# Altium PCB BLDC_4.PcbDoc (part 1 of 2)
Units mm, origin at the board's own origin, x right, y up, seen from the top; angles counter-clockwise.
Board outline 48.4 x 75 mm, 4 copper layers (F.Cu, In1.Cu, In2.Cu, B.Cu); 132 components, 115 nets, 434 pads, 199 vias.
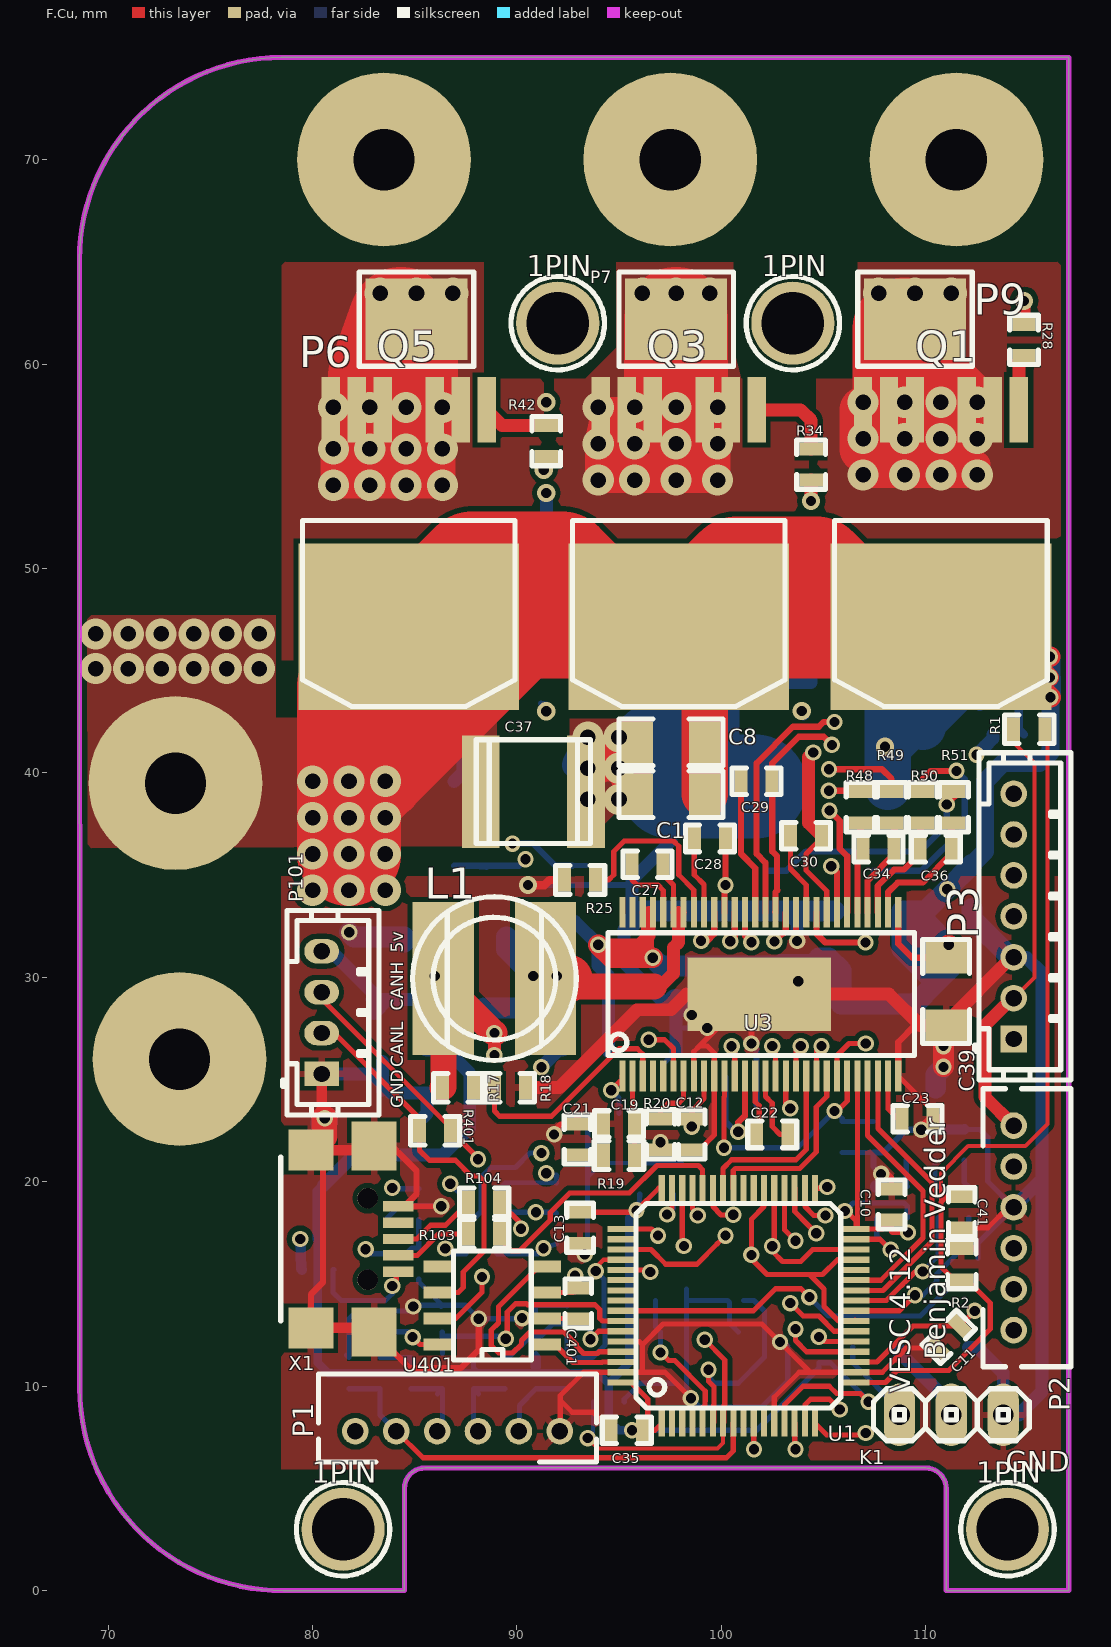
[diagram p0: F.Cu view]
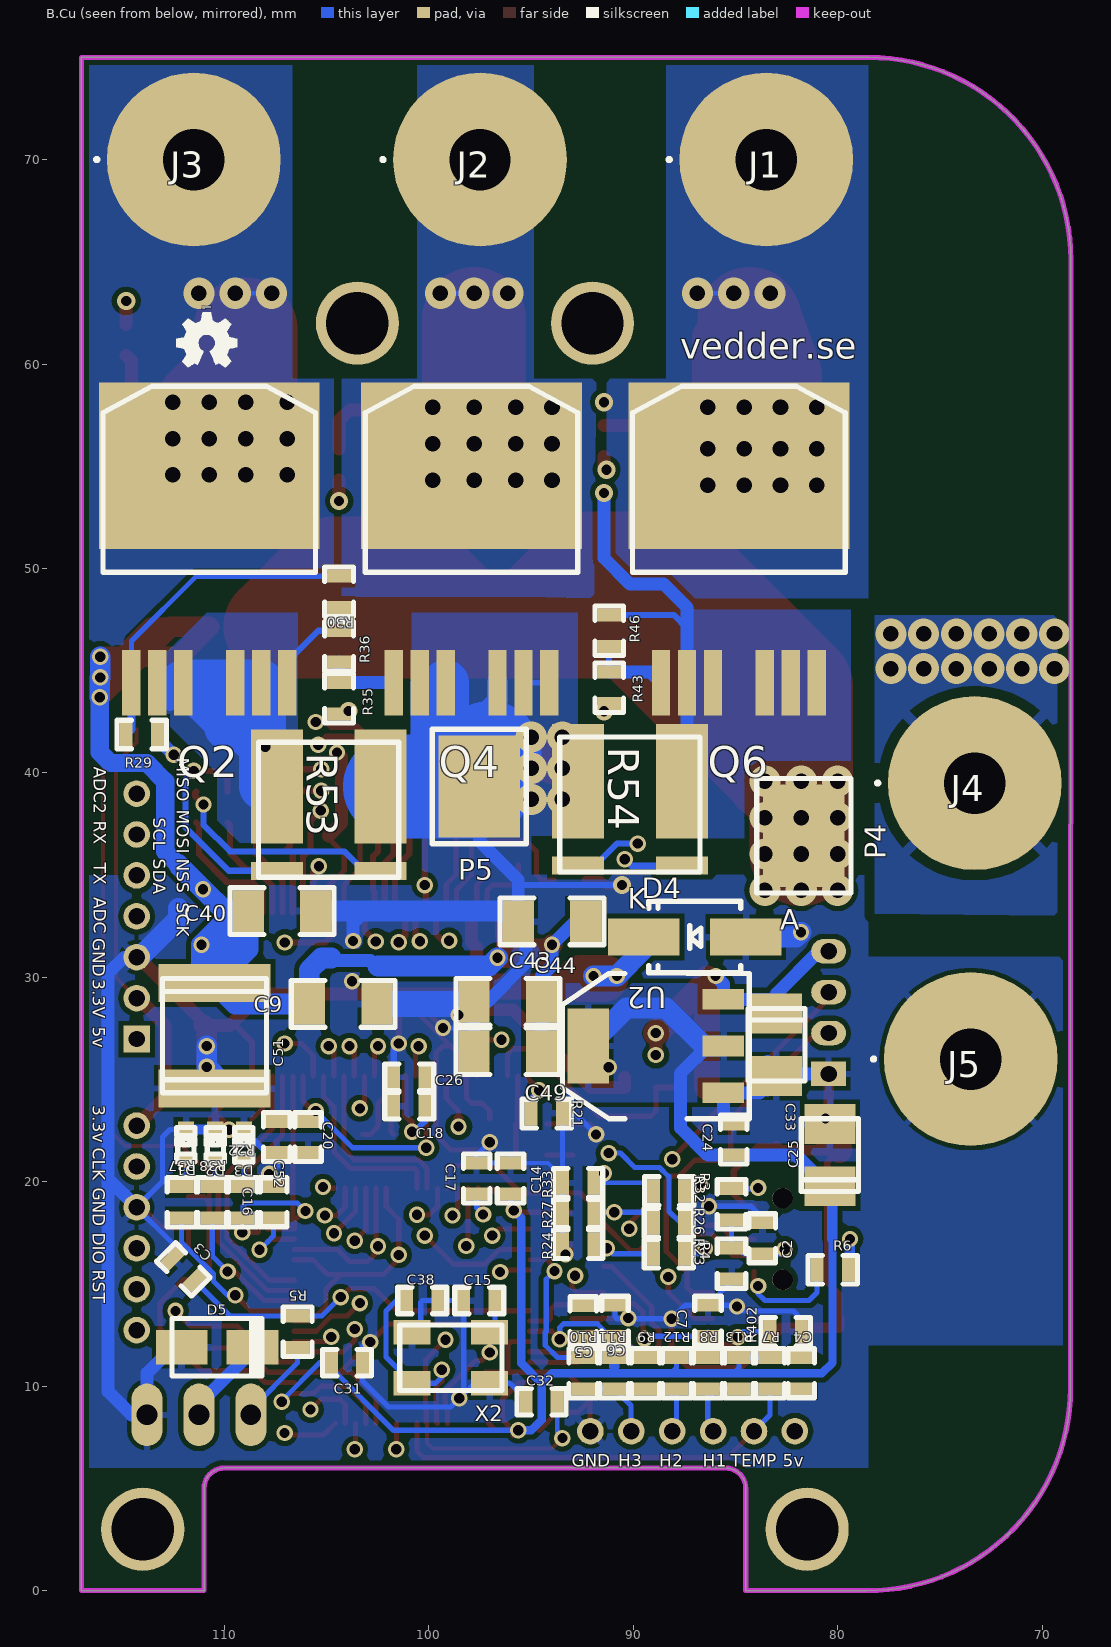
[diagram p1: B.Cu view, seen from below]
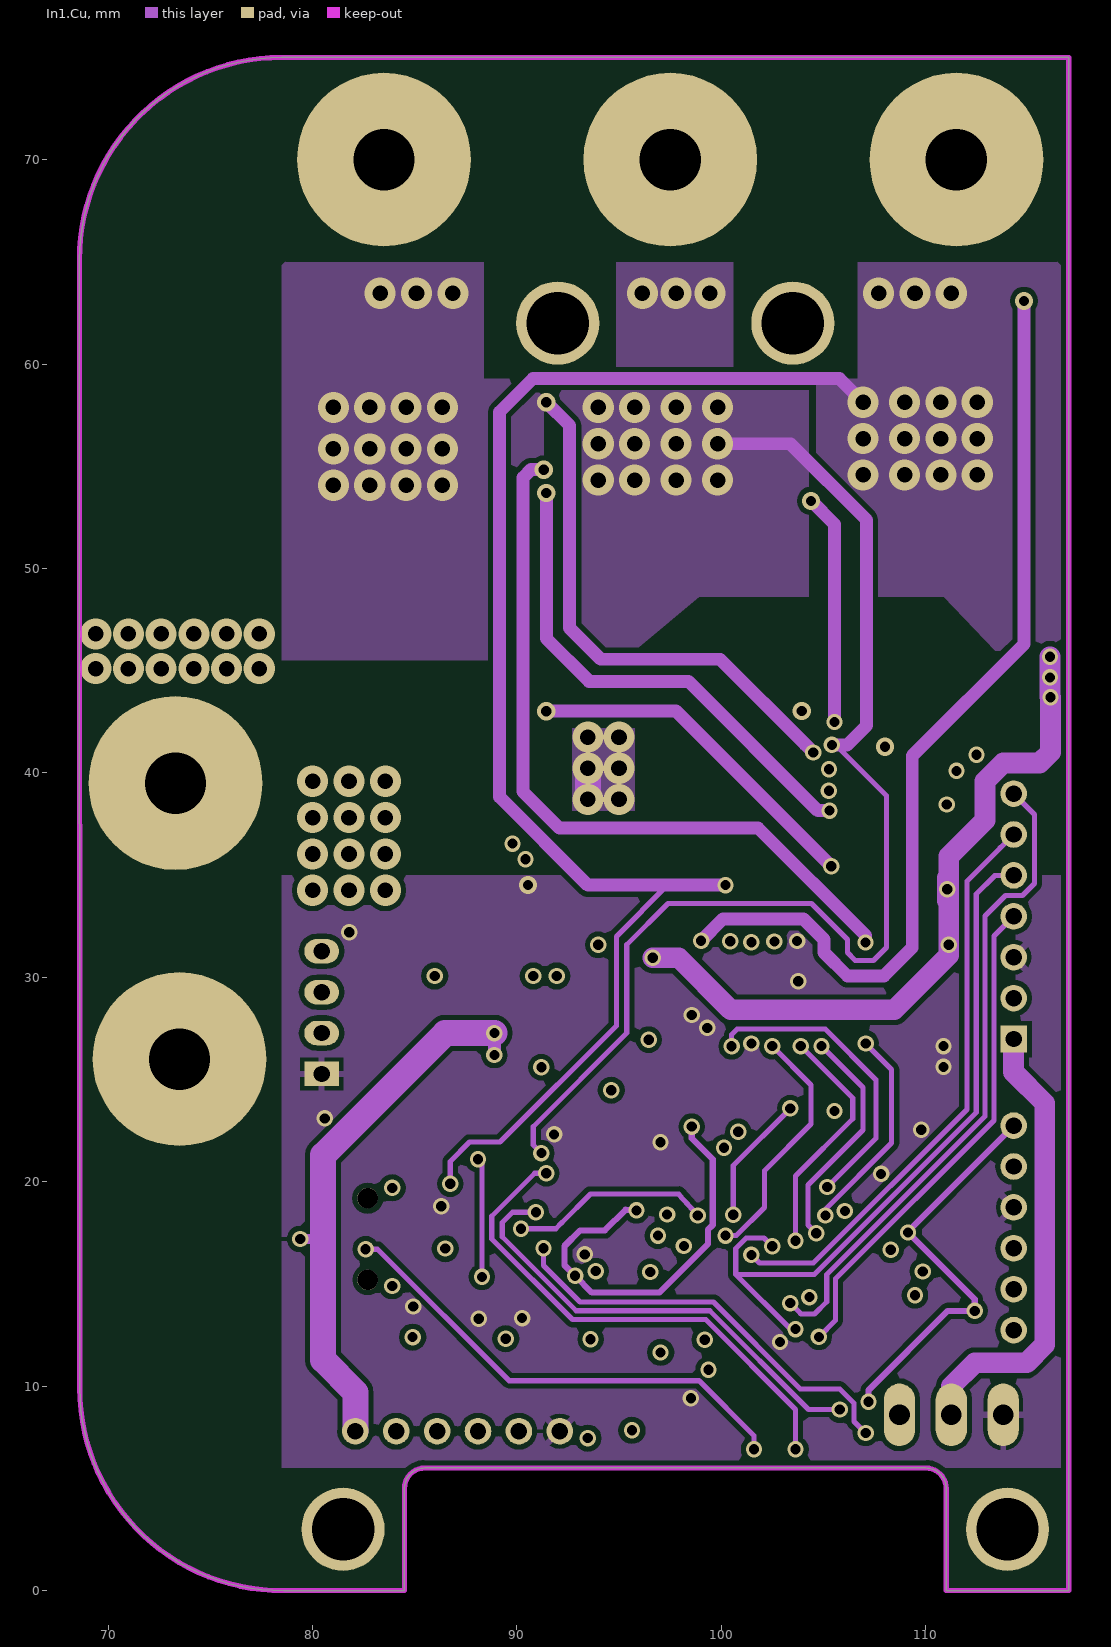
[diagram p2: In1.Cu]
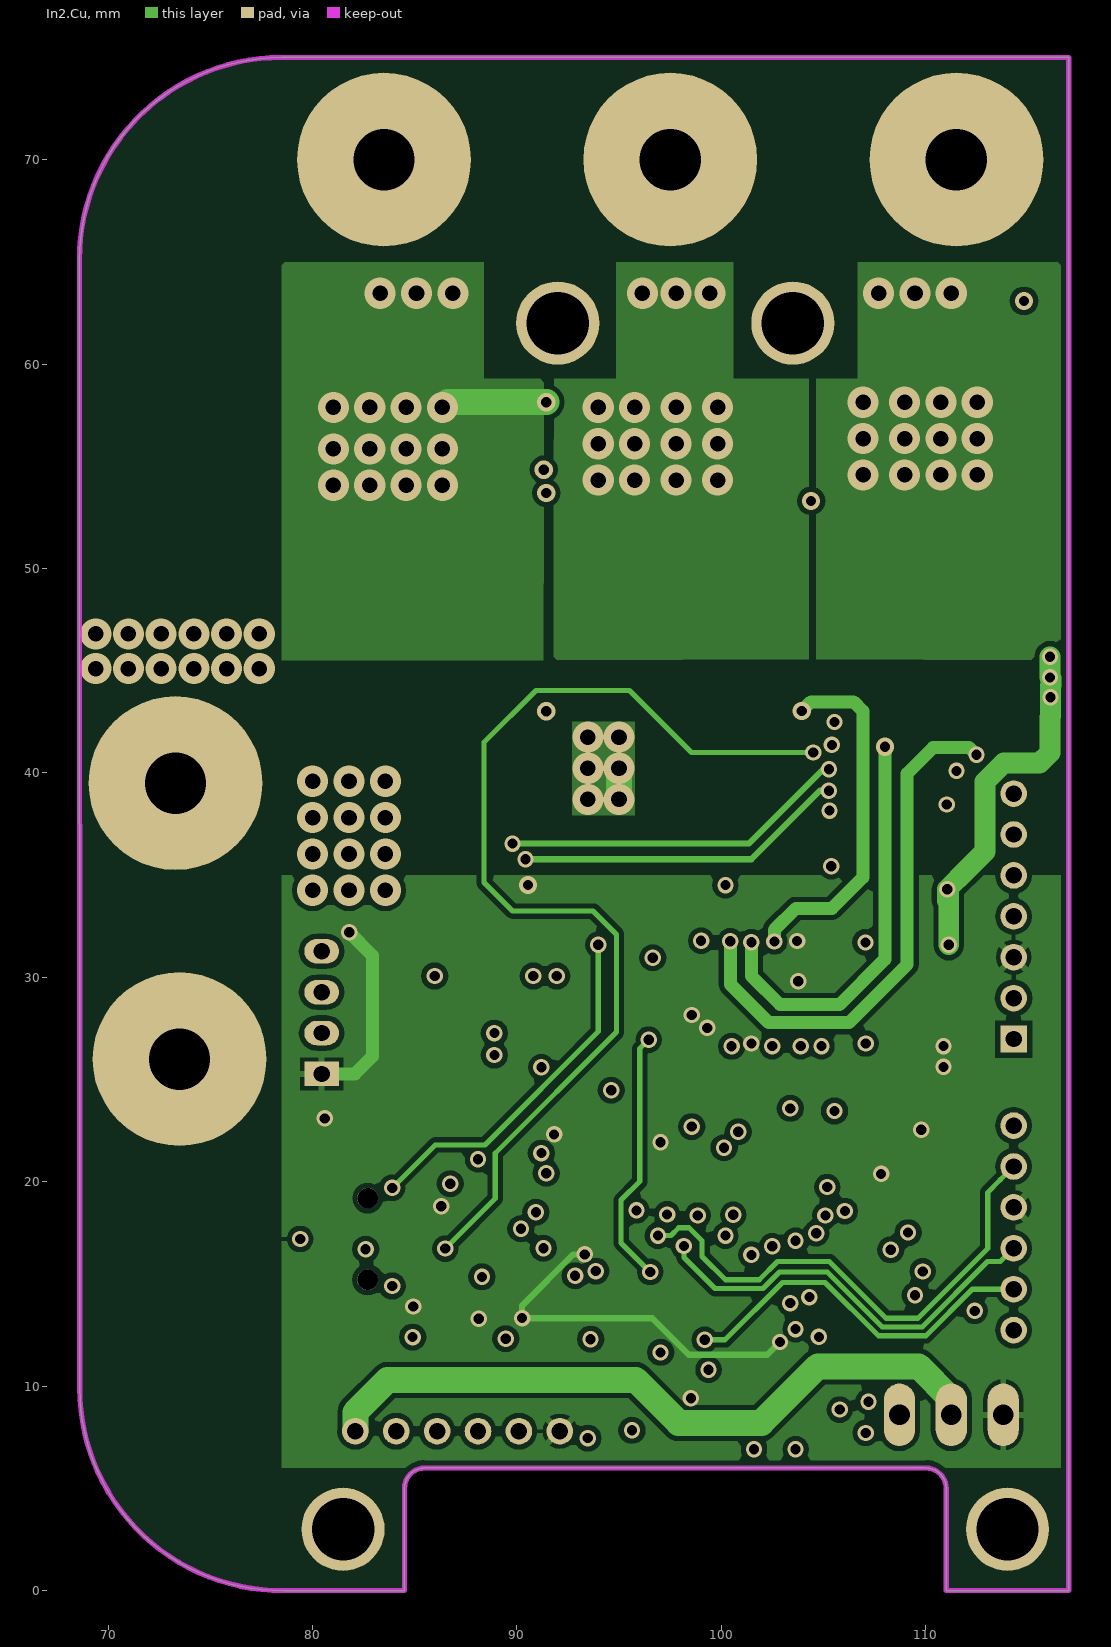
[diagram p3: In2.Cu]

## Layer stack, top to bottom
F.Mask: solder mask 0.0102, Solder Resist, Dk 3.5
F.Cu: signal copper 0.0356
Dielectric 1: dielectric 0.32, FR-4, Dk 4.8
In1.Cu: signal copper 0.0356
Dielectric2: dielectric 0.32, FR-4, Dk 4.8
In2.Cu: signal copper 0.0356
Dielectric3: dielectric 0.32, FR-4, Dk 4.8
B.Cu: signal copper 0.0356
B.Mask: solder mask 0.0102, Solder Resist, Dk 3.5

## Board outline
84.5,0 78.6,0 cw(c78.518,9.9) 68.618,9.9 68.6,65.1 cw(c78.5,65.1) 78.5,75 117,75 117,0 111,0 111,5 ccw(c110,5) 85.5,6 ccw(c85.5,5) 84.5,0

## Design rules (kind name [scope] priority, off if disabled: settings)
Clearance "Clearence 0.508_Polygon" [InNamedPolygon('In1.Cu-GND') OR InNamedPolygon('In2.Cu-GND') OR InNamedPolygon('B.Cu-V_SUPPLY')] p1: gap=0.508 ignorepadtopadclearanceinfootprint=FALSE
Clearance "Clearence 0.254_Polygon" [InNamedPolygon('F.Cu-GND') OR InNamedPolygon('F.Cu-/Mosfet driver/H3_VS') OR InNamedPolygon('F.Cu-/Mosfet driver/H1_VS') OR InNamedPolygon('F.Cu-GND-1') OR InNamedPolygon('F.Cu-V_SUPPLY') OR InNamedPolygon('F.Cu-/Mosfet driver/H2_VS') OR InNamedPolygon('In1.Cu-/Mosfet driver/H3_VS') OR InNamedPolygon('In1.Cu-/Mosfet driver/H2_VS') OR InNamedPolygon('In1.Cu-/Mosfet driver/H1_VS') OR InNamedPolygon('In1.Cu-GND-1') OR InNamedPolygon('In2.Cu-/Mosfet driver/H1_VS') OR InNamedPolygon('In2.Cu-/Mosfet driver/H2_VS') OR InNamedPolygon('In2.Cu-GND-1') OR InNamedPolygon('In2.Cu-/Mosfet driver/H3_VS') OR InNamedPolygon('B.Cu-VCC') OR InNamedPolygon('B.Cu-/Mosfet driver/H1_LOW') OR InNamedPolygon('B.Cu-/Mosfet driver/H3_LOW') OR InNamedPolygon('B.Cu-/Mosfet driver/H1_VS') OR InNamedPolygon('B.Cu-/Mosfet driver/H3_VS') OR InNamedPolygon('B.Cu-GND') OR InNamedPolygon('B.Cu-/Mosfet driver/H2_VS')] p2: gap=0.254 ignorepadtopadclearanceinfootprint=FALSE
Clearance "Clearence 0.2_PadClass" [InPadClass('Pad Class Clearance 0.2')] p3: gap=0.2 ignorepadtopadclearanceinfootprint=FALSE
MinimumSolderMaskSliver [All] p1: minsoldermaskwidth=0
PolygonConnect "Polygon_B.Cu-/Mosfet driver/H2_VS_ConnectDirect" [IsNamedPolygon('B.Cu-/Mosfet driver/H2_VS')] p1: connectstyle=Direct reliefconductorwidth=0.254 reliefentries=4 polygonreliefangle="90 Angle" airgapwidth=0.254
PolygonConnect Polygon_B.Cu-V_SUPPLY_ConnectDirect [IsNamedPolygon('B.Cu-V_SUPPLY') vs IsVia] p2: connectstyle=Direct reliefconductorwidth=0.254 reliefentries=4 polygonreliefangle="90 Angle" airgapwidth=0.254
PolygonConnect Polygon_B.Cu-V_SUPPLY_ConnectRelief45 [IsNamedPolygon('B.Cu-V_SUPPLY') vs (IsThruPin or IsSMTPin) and (PadShape_AllLayers = 'Round')] p3: connectstyle=Relief reliefconductorwidth=0.5 reliefentries=4 polygonreliefangle="45 Angle" airgapwidth=0.5
PolygonConnect Polygon_B.Cu-V_SUPPLY_ConnectRelief90 [IsNamedPolygon('B.Cu-V_SUPPLY') vs (IsThruPin or IsSMTPin) and (PadShape_AllLayers <> 'Round')] p4: connectstyle=Relief reliefconductorwidth=0.5 reliefentries=4 polygonreliefangle="90 Angle" airgapwidth=0.5
PolygonConnect Polygon_B.Cu-GND_ConnectDirect [IsNamedPolygon('B.Cu-GND') vs IsVia] p5: connectstyle=Direct reliefconductorwidth=0.254 reliefentries=4 polygonreliefangle="90 Angle" airgapwidth=0.254
PolygonConnect Polygon_B.Cu-GND_ConnectRelief45 [IsNamedPolygon('B.Cu-GND') vs (IsThruPin or IsSMTPin) and (PadShape_AllLayers = 'Round')] p6: connectstyle=Relief reliefconductorwidth=0.318 reliefentries=4 polygonreliefangle="45 Angle" airgapwidth=0.203
PolygonConnect Polygon_B.Cu-GND_ConnectRelief90 [IsNamedPolygon('B.Cu-GND') vs (IsThruPin or IsSMTPin) and (PadShape_AllLayers <> 'Round')] p7: connectstyle=Relief reliefconductorwidth=0.318 reliefentries=4 polygonreliefangle="90 Angle" airgapwidth=0.203
PolygonConnect "Polygon_B.Cu-/Mosfet driver/H3_VS_ConnectDirect" [IsNamedPolygon('B.Cu-/Mosfet driver/H3_VS')] p8: connectstyle=Direct reliefconductorwidth=0.254 reliefentries=4 polygonreliefangle="90 Angle" airgapwidth=0.254
PolygonConnect "Polygon_B.Cu-/Mosfet driver/H1_VS_ConnectDirect" [IsNamedPolygon('B.Cu-/Mosfet driver/H1_VS')] p9: connectstyle=Direct reliefconductorwidth=0.254 reliefentries=4 polygonreliefangle="90 Angle" airgapwidth=0.254
PolygonConnect "Polygon_B.Cu-/Mosfet driver/H3_LOW_ConnectDirect" [IsNamedPolygon('B.Cu-/Mosfet driver/H3_LOW')] p10: connectstyle=Direct reliefconductorwidth=0.254 reliefentries=4 polygonreliefangle="90 Angle" airgapwidth=0.254
PolygonConnect "Polygon_B.Cu-/Mosfet driver/H1_LOW_ConnectDirect" [IsNamedPolygon('B.Cu-/Mosfet driver/H1_LOW')] p11: connectstyle=Direct reliefconductorwidth=0.254 reliefentries=4 polygonreliefangle="90 Angle" airgapwidth=0.254
PolygonConnect Polygon_B.Cu-VCC_ConnectDirect [IsNamedPolygon('B.Cu-VCC') vs IsVia] p12: connectstyle=Direct reliefconductorwidth=0.254 reliefentries=4 polygonreliefangle="90 Angle" airgapwidth=0.254
PolygonConnect Polygon_B.Cu-VCC_ConnectRelief45 [IsNamedPolygon('B.Cu-VCC') vs (IsThruPin or IsSMTPin) and (PadShape_AllLayers = 'Round')] p13: connectstyle=Relief reliefconductorwidth=0.318 reliefentries=4 polygonreliefangle="45 Angle" airgapwidth=0.203
PolygonConnect Polygon_B.Cu-VCC_ConnectRelief90 [IsNamedPolygon('B.Cu-VCC') vs (IsThruPin or IsSMTPin) and (PadShape_AllLayers <> 'Round')] p14: connectstyle=Relief reliefconductorwidth=0.318 reliefentries=4 polygonreliefangle="90 Angle" airgapwidth=0.203
PolygonConnect "Polygon_In2.Cu-/Mosfet driver/H3_VS_ConnectDirect" [IsNamedPolygon('In2.Cu-/Mosfet driver/H3_VS') vs IsVia] p15: connectstyle=Direct reliefconductorwidth=0.254 reliefentries=4 polygonreliefangle="90 Angle" airgapwidth=0.254
PolygonConnect "Polygon_In2.Cu-/Mosfet driver/H3_VS_ConnectRelief45" [IsNamedPolygon('In2.Cu-/Mosfet driver/H3_VS') vs (IsThruPin or IsSMTPin) and (PadShape_AllLayers = 'Round')] p16: connectstyle=Relief reliefconductorwidth=0.318 reliefentries=4 polygonreliefangle="45 Angle" airgapwidth=0.203
PolygonConnect "Polygon_In2.Cu-/Mosfet driver/H3_VS_ConnectRelief90" [IsNamedPolygon('In2.Cu-/Mosfet driver/H3_VS') vs (IsThruPin or IsSMTPin) and (PadShape_AllLayers <> 'Round')] p17: connectstyle=Relief reliefconductorwidth=0.318 reliefentries=4 polygonreliefangle="90 Angle" airgapwidth=0.203
PolygonConnect Polygon_In2.Cu-GND-1_ConnectDirect [IsNamedPolygon('In2.Cu-GND-1') vs IsVia] p18: connectstyle=Direct reliefconductorwidth=0.254 reliefentries=4 polygonreliefangle="90 Angle" airgapwidth=0.254
PolygonConnect Polygon_In2.Cu-GND-1_ConnectRelief45 [IsNamedPolygon('In2.Cu-GND-1') vs (IsThruPin or IsSMTPin) and (PadShape_AllLayers = 'Round')] p19: connectstyle=Relief reliefconductorwidth=0.318 reliefentries=4 polygonreliefangle="45 Angle" airgapwidth=0.203
PolygonConnect Polygon_In2.Cu-GND-1_ConnectRelief90 [IsNamedPolygon('In2.Cu-GND-1') vs (IsThruPin or IsSMTPin) and (PadShape_AllLayers <> 'Round')] p20: connectstyle=Relief reliefconductorwidth=0.318 reliefentries=4 polygonreliefangle="90 Angle" airgapwidth=0.203
PolygonConnect "Polygon_In2.Cu-/Mosfet driver/H2_VS_ConnectDirect" [IsNamedPolygon('In2.Cu-/Mosfet driver/H2_VS') vs IsVia] p21: connectstyle=Direct reliefconductorwidth=0.254 reliefentries=4 polygonreliefangle="90 Angle" airgapwidth=0.254
PolygonConnect "Polygon_In2.Cu-/Mosfet driver/H2_VS_ConnectRelief45" [IsNamedPolygon('In2.Cu-/Mosfet driver/H2_VS') vs (IsThruPin or IsSMTPin) and (PadShape_AllLayers = 'Round')] p22: connectstyle=Relief reliefconductorwidth=0.318 reliefentries=4 polygonreliefangle="45 Angle" airgapwidth=0.203
PolygonConnect "Polygon_In2.Cu-/Mosfet driver/H2_VS_ConnectRelief90" [IsNamedPolygon('In2.Cu-/Mosfet driver/H2_VS') vs (IsThruPin or IsSMTPin) and (PadShape_AllLayers <> 'Round')] p23: connectstyle=Relief reliefconductorwidth=0.318 reliefentries=4 polygonreliefangle="90 Angle" airgapwidth=0.203
PolygonConnect "Polygon_In2.Cu-/Mosfet driver/H1_VS_ConnectDirect" [IsNamedPolygon('In2.Cu-/Mosfet driver/H1_VS') vs IsVia] p24: connectstyle=Direct reliefconductorwidth=0.254 reliefentries=4 polygonreliefangle="90 Angle" airgapwidth=0.254
PolygonConnect "Polygon_In2.Cu-/Mosfet driver/H1_VS_ConnectRelief45" [IsNamedPolygon('In2.Cu-/Mosfet driver/H1_VS') vs (IsThruPin or IsSMTPin) and (PadShape_AllLayers = 'Round')] p25: connectstyle=Relief reliefconductorwidth=0.318 reliefentries=4 polygonreliefangle="45 Angle" airgapwidth=0.203
PolygonConnect "Polygon_In2.Cu-/Mosfet driver/H1_VS_ConnectRelief90" [IsNamedPolygon('In2.Cu-/Mosfet driver/H1_VS') vs (IsThruPin or IsSMTPin) and (PadShape_AllLayers <> 'Round')] p26: connectstyle=Relief reliefconductorwidth=0.318 reliefentries=4 polygonreliefangle="90 Angle" airgapwidth=0.203
PolygonConnect Polygon_In2.Cu-GND_ConnectDirect [IsNamedPolygon('In2.Cu-GND') vs IsVia] p27: connectstyle=Direct reliefconductorwidth=0.254 reliefentries=4 polygonreliefangle="90 Angle" airgapwidth=0.254
PolygonConnect Polygon_In2.Cu-GND_ConnectRelief45 [IsNamedPolygon('In2.Cu-GND') vs (IsThruPin or IsSMTPin) and (PadShape_AllLayers = 'Round')] p28: connectstyle=Relief reliefconductorwidth=0.305 reliefentries=4 polygonreliefangle="45 Angle" airgapwidth=0.203
PolygonConnect Polygon_In2.Cu-GND_ConnectRelief90 [IsNamedPolygon('In2.Cu-GND') vs (IsThruPin or IsSMTPin) and (PadShape_AllLayers <> 'Round')] p29: connectstyle=Relief reliefconductorwidth=0.305 reliefentries=4 polygonreliefangle="90 Angle" airgapwidth=0.203
PolygonConnect Polygon_In1.Cu-GND-1_ConnectDirect [IsNamedPolygon('In1.Cu-GND-1') vs IsVia] p30: connectstyle=Direct reliefconductorwidth=0.254 reliefentries=4 polygonreliefangle="90 Angle" airgapwidth=0.254
PolygonConnect Polygon_In1.Cu-GND-1_ConnectRelief45 [IsNamedPolygon('In1.Cu-GND-1') vs (IsThruPin or IsSMTPin) and (PadShape_AllLayers = 'Round')] p31: connectstyle=Relief reliefconductorwidth=0.318 reliefentries=4 polygonreliefangle="45 Angle" airgapwidth=0.203
PolygonConnect Polygon_In1.Cu-GND-1_ConnectRelief90 [IsNamedPolygon('In1.Cu-GND-1') vs (IsThruPin or IsSMTPin) and (PadShape_AllLayers <> 'Round')] p32: connectstyle=Relief reliefconductorwidth=0.318 reliefentries=4 polygonreliefangle="90 Angle" airgapwidth=0.203
PolygonConnect Polygon_In1.Cu-GND_ConnectDirect [IsNamedPolygon('In1.Cu-GND') vs IsVia] p33: connectstyle=Direct reliefconductorwidth=0.254 reliefentries=4 polygonreliefangle="90 Angle" airgapwidth=0.254
PolygonConnect Polygon_In1.Cu-GND_ConnectRelief45 [IsNamedPolygon('In1.Cu-GND') vs (IsThruPin or IsSMTPin) and (PadShape_AllLayers = 'Round')] p34: connectstyle=Relief reliefconductorwidth=0.305 reliefentries=4 polygonreliefangle="45 Angle" airgapwidth=0.203
PolygonConnect Polygon_In1.Cu-GND_ConnectRelief90 [IsNamedPolygon('In1.Cu-GND') vs (IsThruPin or IsSMTPin) and (PadShape_AllLayers <> 'Round')] p35: connectstyle=Relief reliefconductorwidth=0.305 reliefentries=4 polygonreliefangle="90 Angle" airgapwidth=0.203
PolygonConnect "Polygon_In1.Cu-/Mosfet driver/H1_VS_ConnectDirect" [IsNamedPolygon('In1.Cu-/Mosfet driver/H1_VS') vs IsVia] p36: connectstyle=Direct reliefconductorwidth=0.254 reliefentries=4 polygonreliefangle="90 Angle" airgapwidth=0.254
PolygonConnect "Polygon_In1.Cu-/Mosfet driver/H1_VS_ConnectRelief45" [IsNamedPolygon('In1.Cu-/Mosfet driver/H1_VS') vs (IsThruPin or IsSMTPin) and (PadShape_AllLayers = 'Round')] p37: connectstyle=Relief reliefconductorwidth=0.318 reliefentries=4 polygonreliefangle="45 Angle" airgapwidth=0.203
PolygonConnect "Polygon_In1.Cu-/Mosfet driver/H1_VS_ConnectRelief90" [IsNamedPolygon('In1.Cu-/Mosfet driver/H1_VS') vs (IsThruPin or IsSMTPin) and (PadShape_AllLayers <> 'Round')] p38: connectstyle=Relief reliefconductorwidth=0.318 reliefentries=4 polygonreliefangle="90 Angle" airgapwidth=0.203
PolygonConnect "Polygon_In1.Cu-/Mosfet driver/H2_VS_ConnectDirect" [IsNamedPolygon('In1.Cu-/Mosfet driver/H2_VS') vs IsVia] p39: connectstyle=Direct reliefconductorwidth=0.254 reliefentries=4 polygonreliefangle="90 Angle" airgapwidth=0.254
PolygonConnect "Polygon_In1.Cu-/Mosfet driver/H2_VS_ConnectRelief45" [IsNamedPolygon('In1.Cu-/Mosfet driver/H2_VS') vs (IsThruPin or IsSMTPin) and (PadShape_AllLayers = 'Round')] p40: connectstyle=Relief reliefconductorwidth=0.318 reliefentries=4 polygonreliefangle="45 Angle" airgapwidth=0.203
PolygonConnect "Polygon_In1.Cu-/Mosfet driver/H2_VS_ConnectRelief90" [IsNamedPolygon('In1.Cu-/Mosfet driver/H2_VS') vs (IsThruPin or IsSMTPin) and (PadShape_AllLayers <> 'Round')] p41: connectstyle=Relief reliefconductorwidth=0.318 reliefentries=4 polygonreliefangle="90 Angle" airgapwidth=0.203
PolygonConnect "Polygon_In1.Cu-/Mosfet driver/H3_VS_ConnectDirect" [IsNamedPolygon('In1.Cu-/Mosfet driver/H3_VS') vs IsVia] p42: connectstyle=Direct reliefconductorwidth=0.254 reliefentries=4 polygonreliefangle="90 Angle" airgapwidth=0.254
PolygonConnect "Polygon_In1.Cu-/Mosfet driver/H3_VS_ConnectRelief45" [IsNamedPolygon('In1.Cu-/Mosfet driver/H3_VS') vs (IsThruPin or IsSMTPin) and (PadShape_AllLayers = 'Round')] p43: connectstyle=Relief reliefconductorwidth=0.318 reliefentries=4 polygonreliefangle="45 Angle" airgapwidth=0.203
PolygonConnect "Polygon_In1.Cu-/Mosfet driver/H3_VS_ConnectRelief90" [IsNamedPolygon('In1.Cu-/Mosfet driver/H3_VS') vs (IsThruPin or IsSMTPin) and (PadShape_AllLayers <> 'Round')] p44: connectstyle=Relief reliefconductorwidth=0.318 reliefentries=4 polygonreliefangle="90 Angle" airgapwidth=0.203
PolygonConnect "Polygon_F.Cu-/Mosfet driver/H2_VS_ConnectDirect" [IsNamedPolygon('F.Cu-/Mosfet driver/H2_VS')] p45: connectstyle=Direct reliefconductorwidth=0.254 reliefentries=4 polygonreliefangle="90 Angle" airgapwidth=0.254
PolygonConnect Polygon_F.Cu-V_SUPPLY_ConnectDirect [IsNamedPolygon('F.Cu-V_SUPPLY')] p46: connectstyle=Direct reliefconductorwidth=0.254 reliefentries=4 polygonreliefangle="90 Angle" airgapwidth=0.254
PolygonConnect Polygon_F.Cu-GND-1_ConnectDirect [IsNamedPolygon('F.Cu-GND-1')] p47: connectstyle=Direct reliefconductorwidth=0.254 reliefentries=4 polygonreliefangle="90 Angle" airgapwidth=0.254
PolygonConnect "Polygon_F.Cu-/Mosfet driver/H1_VS_ConnectDirect" [IsNamedPolygon('F.Cu-/Mosfet driver/H1_VS')] p48: connectstyle=Direct reliefconductorwidth=0.254 reliefentries=4 polygonreliefangle="90 Angle" airgapwidth=0.254
PolygonConnect "Polygon_F.Cu-/Mosfet driver/H3_VS_ConnectDirect" [IsNamedPolygon('F.Cu-/Mosfet driver/H3_VS')] p49: connectstyle=Direct reliefconductorwidth=0.254 reliefentries=4 polygonreliefangle="90 Angle" airgapwidth=0.254
PolygonConnect Polygon_F.Cu-GND_ConnectDirect [IsNamedPolygon('F.Cu-GND') vs IsVia] p50: connectstyle=Direct reliefconductorwidth=0.254 reliefentries=4 polygonreliefangle="90 Angle" airgapwidth=0.254
PolygonConnect Polygon_F.Cu-GND_ConnectRelief45 [IsNamedPolygon('F.Cu-GND') vs (IsThruPin or IsSMTPin) and (PadShape_AllLayers = 'Round')] p51: connectstyle=Relief reliefconductorwidth=0.318 reliefentries=4 polygonreliefangle="45 Angle" airgapwidth=0.203
PolygonConnect Polygon_F.Cu-GND_ConnectRelief90 [IsNamedPolygon('F.Cu-GND') vs (IsThruPin or IsSMTPin) and (PadShape_AllLayers <> 'Round')] p52: connectstyle=Relief reliefconductorwidth=0.318 reliefentries=4 polygonreliefangle="90 Angle" airgapwidth=0.203
RoutingVias [All] p1: holewidth=0.711 width=1.27 viastyle="Through Hole" minholewidth=0.711 minwidth=1.27 maxholewidth=0.711 maxwidth=1.27
SilkToSilkClearance [All] p1: silktosilkclearance=0
SilkToSolderMaskClearance [IsPad] p1: minsilkscreentomaskgap=0 clearancetoexposedcopper=TRUE
SolderMaskExpansion [All] p1: expansion=0.102 istentingtop=FALSE
Width [All] p1: maxlimit=10 minlimit=0.254 preferedwidth=0.254 minimp=50.000000 maximp=50.000000 favimp=50.000000
27 further rules are at their usual default settings.

## Classes and differential pairs
pad class "Pad Class Clearance 0.2": X1-Un1 X1-Un2

## Components (designator, comment, footprint, x,y, rotation, side; value= is the part's Value field where it differs from the comment)
1PIN "Comment" 1pin 81.5,3 r0 top value=P***
1PIN "Comment" 1pin 114,3 r0 top value=P***
1PIN "Comment" 1pin 103.5,62 r0 top value=P***
1PIN "Comment" 1pin 92,62 r0 top value=P***
C1 "Comment" SMD-1206#1 97.536,38.955 r0 top value=10u,50V
C2 "Comment" SMD-0603_c#1 83.693,17.238 r90 bottom value=100n
C3 "Comment" SMD-0603_c#1 112.014,15.714 r45 bottom value=100n
C4 "Comment" SMD-0603_c#1 81.788,10.634 r90 bottom value=4n7
C5 "Comment" SMD-0603_c#1 92.456,13.174 r270 bottom value=4n7
C6 "Comment" SMD-0603_c#1 90.9,13.2 r270 bottom value=4n7
C7 "Comment" SMD-0603_c#1 86.35,13.2 r270 bottom value=4n7
C8 "Comment" SMD-1206#1 97.536,41.495 r0 top value=10u,50V
C9 "Comment" SMD-1206#2 104.2,28.7 r180 bottom value=10u,50V
C10 "Comment" SMD-0603_c#2 108.331,18.889 r270 top value=2.2u
C11 "Comment" SMD-0603_c#2 111.125,12.412 r45 top value=2.2u
C12 "Comment" SMD-0603_c#2 98.552,22.318 r90 top value=2.2u
C13 "Comment" SMD-0603_c#2 93.091,17.746 r90 top value=2.2u
C14 "Comment" SMD-0603_c#1 96.012,20.159 r90 bottom value=2.2u
C15 "Comment" SMD-0603_c#1 97.536,14.19 r180 bottom value=15p
C16 "Comment" SMD-0603_c#1 107.6,19 r270 bottom value=2.2u
C17 "Comment" SMD-0603_c#1 97.663,20.159 r270 bottom value=2.2u
C18 "Comment" SMD-0603_c#1 100.965,23.715 r180 bottom value=2.2u
C19 "Comment" SMD-0603_c#2 94.996,22.826 r0 top value=120p
C20 "Comment" SMD-0603_c#1 105.918,22.191 r270 bottom value=2.2u
C21 "Comment" SMD-0603_c#2 92.964,22.064 r270 top value=6.8n
C22 "Comment" SMD-0603_c#2 102.489,22.318 r0 top value=22n
C23 "Comment" SMD-0603_c#2 109.601,23.08 r180 top value=2.2u
C24 "Comment" SMD-0603_c#1 85.09,22.064 r270 bottom value=2.2u
C25 "Comment" c_tant_B 80.391,21.302 r90 bottom value=100u
C26 "Comment" SMD-0603_c#1 100.965,25.112 r180 bottom value=2.2u
C27 "Comment" SMD-0603_c#2 96.393,35.526 r180 top value=100n
C28 "Comment" SMD-0603_c#2 99.441,36.796 r180 top value=220n
C29 "Comment" SMD-0603_c#2 101.727,39.59 r180 top value=220n
C30 "Comment" SMD-0603_c#2 104.14,36.923 r180 top value=220n
C31 "Comment" SMD-0603_c#1 104.013,11.142 r180 bottom value=2.2u
C32 "Comment" SMD-0603_c#1 94.488,9.237 r0 bottom value=100n
C33 "Comment" c_tant_B 83,26.7 r270 bottom value=100u
C34 "Comment" SMD-0603_c#2 107.696,36.288 r0 top value=2.2n
C35 "Comment" SMD-0603_c#2 95.377,7.84 r0 top value=2.2u
C36 "Comment" SMD-0603_c#2 110.49,36.288 r0 top value=2.2n
C37 "Comment" c_2220#1 90.805,39.082 r0 top value=15u,100V
C38 "Comment" SMD-0603_c#1 100.33,14.19 r0 bottom value=15p
C39 "Comment" SMD-1206#1 110.998,29.303 r90 top value=10u,50V
C40 "Comment" SMD-1206#2 107.188,33.24 r180 bottom value=10u,50V
C41 "Comment" SMD-0603_c#2 111.76,18.508 r270 top value=2.2u
C43 "Comment" SMD-1206#2 93.98,32.732 r180 bottom value=10u,50V
C44 "Comment" SMD-1206#2 96.139,28.795 r180 bottom value=10u,50V
C49 "Comment" SMD-1206#2 96.139,26.382 r180 bottom value=10u,50V
C51 "Comment" c_2220#2 110.49,27.144 r90 bottom value="15u, 100v"
C52 "Comment" SMD-0603_c#1 107.442,22.191 r270 bottom value=2.2u
C401 "Comment" SMD-0603_c#2 93,14.05 r270 top value=2.2u
D1 "Comment" LED-0603 111.887,21.81 r270 bottom value=GREEN
D2 "Comment" LED-0603 110.45,21.8 r270 bottom value=RED
D3 "Comment" LED-0603 109.05,21.8 r270 bottom value=LED
D4 "Comment" SMA_Handsoldering 86.995,31.97 r0 bottom value=DIODESCH
D5 "Comment" do214ac 110.363,11.904 r0 bottom value="TVS 5V"
G*** "Comment" oshw_silkscreen-back_3mm 110.871,61.18 r180 bottom value=oshw_silkscreen-back_3mm
J1 "Comment" 7466103 83.5,70 r0 bottom value=7466103
J2 "Comment" 7466103 97.5,70 r0 bottom value=7466103
J3 "Comment" 7466103 111.5,70 r0 bottom value=7466103
J4 "Comment" 7466103 73.3,39.5 r0 bottom value=7466103
J5 "Comment" 7466103 73.5,26 r0 bottom value=7466103
K1 "Comment" pinhead-1X03 111.252,8.602 r0 top value=SERVO
L1 "Comment" inductor_smd_8x5mm 88.9,29.938 r180 top value=22u
P1 "Comment" MICRO_JST_6 87.1,7.8 r0 top value=HALL/Encoder
P2 "Comment" MICRO_JST_6 114.3,17.746 r270 top value=SWD
P3 "Comment" b7b-ph-kl 114.3,32.986 r90 top value=PWR_COMM
P4 "Comment" 1PAD_4x5mm 81.661,36.923 r180 bottom value=IN+
P5 "Comment" 1PAD_4x5mm 97.536,39.336 r180 bottom value=IN-
P6 "Comment" 1PAD_4x5mm 85.09,62.196 r90 top value=MOTOR1
P7 "Comment" 1PAD_4x5mm 97.79,62.196 r90 top value=MOTOR2
P9 "Comment" 1PAD_4x5mm 109.474,62.196 r90 top value=MOTOR3
P101 "Comment" b4b-ph-kl 80.45,28.274 r90 top value=CANBUS
Q1 "Comment" D2PAK-7-GDS#1 110.744,53.052 r180 top value=IRFS7530
Q2 "Comment" D2PAK-7-GDS#2 110.744,49.115 r0 bottom value=IRFS7530
Q3 "Comment" D2PAK-7-GDS#1 97.917,53.052 r180 top value=IRFS7530
Q4 "Comment" D2PAK-7-GDS#2 97.917,49.115 r0 bottom value=IRFS7530
Q5 "Comment" D2PAK-7-GDS#1 84.709,53.052 r180 top value=IRFS7530
Q6 "Comment" D2PAK-7-GDS#2 84.836,49.115 r0 bottom value=IRFS7530
R1 "Comment" SMD-0603_r#1 115.062,42.13 r0 top value="NTC 10k"
R2 "Comment" SMD-0603_r#1 111.76,15.968 r90 top value=10k
R3 "Comment" SMD-0603_r#2 85.2,18.9 r90 bottom value=39k
R4 "Comment" SMD-0603_r#2 85.2,16 r270 bottom value=2k2
R5 "Comment" SMD-0603_r#2 106.426,12.666 r90 bottom value=2k2
R6 "Comment" SMD-0603_r#2 80.25,15.7 r0 bottom value=0R
R7 "Comment" SMD-0603_r#2 83.312,10.634 r270 bottom value=10k
R8 "Comment" SMD-0603_r#2 86.36,10.634 r270 bottom value=10k
R9 "Comment" SMD-0603_r#2 89.408,10.634 r270 bottom value=10k
R10 "Comment" SMD-0603_r#2 92.456,10.634 r270 bottom value=10k
R11 "Comment" SMD-0603_r#2 90.932,10.634 r270 bottom value=2k2
R12 "Comment" SMD-0603_r#2 87.884,10.634 r270 bottom value=2k2
R13 "Comment" SMD-0603_r#2 84.836,10.634 r270 bottom value=2k2
R17 "Comment" SMD-0603_r#1 87.122,24.604 r0 top value=18k
R18 "Comment" SMD-0603_r#1 89.662,24.604 r0 top value=3k3
R19 "Comment" SMD-0603_r#1 94.996,21.302 r0 top value=15k
R20 "Comment" SMD-0603_r#1 97.028,22.318 r270 top value=10k
R21 "Comment" SMD-0603_r#2 94.234,23.334 r180 bottom value=220k
R22 "Comment" SMD-0603_r#2 109.1,19 r90 bottom value=2k2
R23 "Comment" SMD-0603_r#2 88.265,16.476 r180 bottom value=39k
R24 "Comment" SMD-0603_r#2 92.7,16.95 r0 bottom value=2k2
R25 "Comment" SMD-0603_r#1 93.091,34.764 r0 top value=1M
R26 "Comment" SMD-0603_r#2 88.265,18 r180 bottom value=39k
R27 "Comment" SMD-0603_r#2 92.7,18.45 r0 bottom value=2k2
R28 "Comment" SMD-0603_r#1 114.808,61.18 r90 top value=4R7
R29 "Comment" SMD-0603_r#2 114.046,41.876 r0 bottom value=4R7
R30 "Comment" SMD-0603_r#2 104.394,48.861 r270 bottom value=39k
R32 "Comment" SMD-0603_r#2 88.25,19.55 r180 bottom value=39k
R33 "Comment" SMD-0603_r#2 92.7,19.95 r0 bottom value=2k2
R34 "Comment" SMD-0603_r#1 104.394,55.084 r270 top value=4R7
R35 "Comment" SMD-0603_r#2 104.394,43.654 r90 bottom value=4R7
R36 "Comment" SMD-0603_r#2 104.394,46.194 r90 bottom value=39k
R37 "Comment" SMD-0603_r#2 112.1,19 r90 bottom value=100R
R38 "Comment" SMD-0603_r#2 110.6,19 r90 bottom value=100R
R42 "Comment" SMD-0603_r#1 91.44,56.227 r270 top value=4R7
R43 "Comment" SMD-0603_r#2 91.186,44.162 r90 bottom value=4R7
R46 "Comment" SMD-0603_r#2 91.186,46.956 r90 bottom value=39k
R48 "Comment" SMD-0603_r#1 106.807,38.32 r270 top value=100R
R49 "Comment" SMD-0603_r#1 108.331,38.32 r270 top value=100R
R50 "Comment" SMD-0603_r#1 109.855,38.32 r270 top value=100R
R51 "Comment" SMD-0603_r#1 111.379,38.32 r270 top value=100R
R53 "Comment" WSLP2726 104.902,36.288 r180 bottom value=SHUNT
R54 "Comment" WSLP2726 90.17,36.542 r180 bottom value=SHUNT
R103 "Comment" SMD-0603_r#1 88.4,17.45 r180 top value=22R
R104 "Comment" SMD-0603_r#1 88.4,19 r180 top value=22R
R401 "Comment" SMD-0603_r#1 86,22.5 r180 top value=NI
R402 "Comment" SMD-0603_r#2 82.55,12.666 r0 bottom value=10k
U1 "Comment" lqfp64_pad_mod 100.838,13.936 r0 top value=STM32F40X_LQFP64
U2 "Comment" SOT-223 88.9,26.636 r270 bottom value=TC2117
U3 "Comment" TSSOP-56-PP 101.854,29.176 r0 top value=DRV8302
U401 "Comment" SOIC-8-W 88.8,13.95 r90 top value=SN65HVD232
X1 "Comment" USB-UX60R-MB-5ST 82.7,17.2 r270 top value=MINI-USB-SHIELD-32005-201
X2 "Comment" Crystal_5x3mm 98.933,11.396 r180 bottom value="8MHz 10ppm"

## Footprints (in the part's own frame and the unit in brackets; to place one, negate y for a bottom-side part, rotate by r counter-clockwise, add the part's x,y. Pads: shape width x height; smd on the part's side, far side on the other; paste and mask are expansions set on the pad)
1PAD_4x5mm [mm]
  rect 4x5 smd mask+0: 1(0,0)
  silkscreen extent -2.3,-2.8 2.3,2.8
1pin [mil]
  round 160 hole 120 paste-99999 mask+0: 1(0,0)
  silkscreen extent -90,-90 90,90
7466103 [mm]
  round 8.5 hole 3 paste-2539.97 mask+0: 1(0,0)
  silkscreen extent 4.7,-0.05 4.8,0.05
b4b-ph-kl [mm]
  rect 1.199x1.699 hole 0.8 paste-2539.97 mask+0: 1(-3.002,0)
  rrect100% 1.199x1.699 hole 0.8 paste-2539.97 mask+0: 2(-1.001,0) 3(1.001,0) 4(3,0)
  silkscreen extent -5,-2.8 5,1.9
b7b-ph-kl [mm]
  rect 1.3x1.3 hole 0.8 paste-2539.97 mask+0: 1(-6.005,0)
  round 1.3 hole 0.8 paste-2539.97 mask+0: 2(-4.003,0) 3(-2.002,0) 4(-0.003,0) 5(1.999,0) 6(4,0) 7(5.999,0)
  silkscreen extent -8,-2.8 8,1.9
c_2220#1 [mil]
  rect 72.8x216.5 smd mask+0: 1(101.4,0) 2(-101.4,0)
  silkscreen extent -110,-100 110,100
c_2220#2 [mil]
  rect 72.8x216.5 smd mask+0: 1(-101.4,0) 2(101.4,0)
  silkscreen extent -110,-100 110,100
c_tant_B [mil]
  rect 76.8x98.4 smd mask+0: 1(-60,0) 2(60,0)
  silkscreen extent -70,-55 70,55
Crystal_5x3mm [mm]
  rect 1.801x1.199 smd mask+0: 1(1.9,1.25) 2(-1.9,-1.25) 3(-1.9,1.25) 3(1.9,-1.25)
  silkscreen extent -2.5,-1.6 2.5,1.6
D2PAK-7-GDS#1 [mil]
  rect 425.2x320.9 smd mask+0: D(0,232.3)
  rect 35.4x126 smd mask+0: G(-150,-185.1) S(-100,-185.1) S(-50,-185.1) S(50,-185.1) S(100,-185.1) S(150,-185.1)
  silkscreen extent -205,28 205,386
D2PAK-7-GDS#2 [mil]
  rect 425.2x320.9 smd mask+0: D(0,-232.3)
  rect 35.4x126 smd mask+0: G(150,185.1) S(-150,185.1) S(-100,185.1) S(-50,185.1) S(50,185.1) S(100,185.1)
  silkscreen extent -205,-386 205,-28
do214ac [mm]
  rect 2.54x1.699 smd mask+0: 1(1.73,0) 2(-1.73,0)
  silkscreen extent -2.2,-1.4 2.2,1.4
inductor_smd_8x5mm [mil]
  rect 118x295.2 smd mask+0: 1(-98.4,0) 2(98.4,0)
  silkscreen extent -158,-158 158,158
LED-0603 [mil]
  rect 31.4x31.4 smd mask+0: 1(29.5,0) 2(-29.5,0)
  silkscreen extent -33,-18 33,18
lqfp64_pad_mod [mm]
  rect 0.3x1.3 smd mask+0: 1(-3.749,-5.751) 2(-3.251,-5.751) 3(-2.751,-5.751) 4(-2.25,-5.751) 5(-1.75,-5.751) 6(-1.25,-5.751) 7(-0.749,-5.751) 8(-0.249,-5.751) 9(0.249,-5.751) 10(0.749,-5.751) 11(1.25,-5.751) 12(1.75,-5.751) 13(2.25,-5.751) 14(2.751,-5.751) 15(3.251,-5.751) 16(3.749,-5.751) 33(3.749,5.751) 34(3.251,5.751) 35(2.751,5.751) 36(2.25,5.751) 37(1.75,5.751) 38(1.25,5.751) 39(0.749,5.751) 40(0.249,5.751) 41(-0.249,5.751) 42(-0.749,5.751) 43(-1.25,5.751) 44(-1.75,5.751) 45(-2.25,5.751) 46(-2.751,5.751) 47(-3.251,5.751) 48(-3.749,5.751)
  rect 1.3x0.3 smd mask+0: 17(5.751,-3.749) 18(5.751,-3.251) 19(5.751,-2.751) 20(5.751,-2.25) 21(5.751,-1.75) 22(5.751,-1.25) 23(5.751,-0.749) 24(5.751,-0.249) 25(5.751,0.249) 26(5.751,0.749) 27(5.751,1.25) 28(5.751,1.75) 29(5.751,2.25) 30(5.751,2.751) 31(5.751,3.251) 32(5.751,3.749) 49(-5.751,3.749) 50(-5.751,3.251) 51(-5.751,2.751) 52(-5.751,2.25) 53(-5.751,1.75) 54(-5.751,1.25) 55(-5.751,0.749) 56(-5.751,0.249) 57(-5.751,-0.249) 58(-5.751,-0.749) 59(-5.751,-1.25) 60(-5.751,-1.75) 61(-5.751,-2.25) 62(-5.751,-2.751) 63(-5.751,-3.251) 64(-5.751,-3.749)
  silkscreen extent -5,-5 5,5
MICRO_JST_6 [mm]
  round 1.3 hole 0.8 paste-2539.97 mask+0: 1(-5.001,0) 2(-3,0) 3(-1.001,0) 4(1.001,0) 5(3,0) 6(5.001,0)
  silkscreen extent -6.8,-1.5 6.8,2.8
oshw_silkscreen-back_3mm [mm]
  silkscreen extent -1.5,-1.35 1.5,1.35
pinhead-1X03 [mil]
  rrect100% 60x120 hole 40 paste-99999 mask+0: 1(-100,0) 2(0,0) 3(100,0)
  silkscreen extent -150,-50 150,50
SMA_Handsoldering [mm]
  rect 3.5x1.801 smd mask+0: 1(-2.499,0) 2(2.499,0)
  silkscreen extent -2.25,-1.75 2.25,1.75
SMD-0603_c#1 [mil]
  rect 25x45 smd mask+0: 1(30,0) 2(-30,0)
  silkscreen extent -47,-26 47,26
SMD-0603_c#2 [mil]
  rect 25x45 smd mask+0: 1(-30,0) 2(30,0)
  silkscreen extent -47,-26 47,26
SMD-0603_r#1 [mil]
  rect 25x45 smd mask+0: 1(-30,0) 2(30,0)
  silkscreen extent -48,-28 48,28
SMD-0603_r#2 [mil]
  rect 25x45 smd mask+0: 1(30,0) 2(-30,0)
  silkscreen extent -48,-28 48,28
SMD-1206#1 [mil]
  rect 60x80 smd mask+0: 1(-65,0) 2(65,0)
  silkscreen extent -100,-45 100,45
SMD-1206#2 [mil]
  rect 60x80 smd mask+0: 1(65,0) 2(-65,0)
  silkscreen extent -100,-45 100,45
SOIC-8-W [mil]
  rect 23.6x55.1 smd mask+0: 1(-75,-105) 2(-25,-105) 3(25,-105) 4(75,-105) 5(75,105) 6(25,105) 7(-25,105) 8(-75,105)
  silkscreen extent -105,-75 105,75
SOT-223 [mil]
  rect 40x80 smd mask+0: 1(90,130) 2(0,130) 3(-90,130)
  rect 144x80 smd mask+0: 2(0,-130)
  silkscreen extent -140,-180 140,180
TSSOP-56-PP [mil]
  rect 11.8x59.1 smd mask+0: 1(-263.6,-157.5) 2(-244,-157.5) 3(-224.3,-157.5) 4(-204.6,-157.5) 5(-184.9,-157.5) 6(-165.2,-157.5) 7(-145.5,-157.5) 8(-125.9,-157.5) 9(-106.2,-157.5) 10(-86.5,-157.5) 11(-66.8,-157.5) 12(-47.1,-157.5) 13(-27.4,-157.5) 14(-7.7,-157.5) 15(11.9,-157.5) 16(31.6,-157.5) 17(51.3,-157.5) 18(71,-157.5) 19(90.7,-157.5) 20(110.4,-157.5) 21(130.1,-157.5) 22(149.7,-157.5) 23(169.4,-157.5) 24(189.1,-157.5) 25(208.8,-157.5) 26(228.5,-157.5) 27(248.2,-157.5) 28(267.8,-157.5) 29(267.8,157.5) 30(248.2,157.5) 31(228.5,157.5) 32(208.8,157.5) 33(189.1,157.5) 34(169.4,157.5) 35(149.7,157.5) 36(130.1,157.5) 37(110.4,157.5) 38(90.7,157.5) 39(71,157.5) 40(51.3,157.5) 41(31.6,157.5) 42(11.9,157.5) 43(-7.7,157.5) 44(-27.4,157.5) 45(-47.1,157.5) 46(-66.8,157.5) 47(-86.5,157.5) 48(-106.2,157.5) 49(-125.9,157.5) 50(-145.5,157.5) 51(-165.2,157.5) 52(-184.9,157.5) 53(-204.6,157.5) 54(-224.3,157.5) 55(-244,157.5) 56(-263.6,157.5)
  rect 275.6x141.7 smd mask+0: 57(0,0)
  silkscreen extent -291,-118 299,118
USB-UX60R-MB-5ST [mm]
  rect 0.5x1.5 smd mask+0: 1(1.6,1.5) 2(0.8,1.5) 3(0,1.5) 4(-0.8,1.5) 5(-1.6,1.5)
  rect 2.4x2.2 smd mask+0: 5(-4.55,0.3) 5(4.55,0.3)
  rect 2x2.2 smd mask+0: 5(-4.35,-2.775) 5(4.35,-2.775)
  round 1 hole 1 paste-2539.97 mask+0: Un1(-2,0) Un2(2,0)
  silkscreen extent -4,-4.25 4,-4.25
WSLP2726 [mil]
  rect 100x220 smd mask+0: 1(100,120) 2(-100,120)
  rect 100x35 smd mask+0: 3(100,-42.5) 4(-100,-42.5)
  silkscreen extent -135,-55 135,205

## Part data
1PIN 1PIN 1PIN 1PIN: library part 1pin, "module 1 pin (ou trou mecanique de percage)"
C1 C8 C9 C39 C40 C43 C44 C49: library part SMD-1206, Footprint=CRF1:SMD-1206, ki_fp_filters="SM* C? C1-1"
C2 C3 C4 C5 C6 C7 C10 C11 C12 C13 C14 C15 C16 C17 C18 C19 C20 C21 C22 C23 C24 C26 C27 C28 C29 C30 C31 C32 C34 C35 C36 C38 C41 C52 C401: library part SMD-0603_c, Footprint=CRF1:SMD-0603_c, ki_fp_filters="SM* C? C1-1"
C25 C33: library part c_tant_B, "SMT capacitor, tantalum size B", Footprint=w_smd_cap:c_tant_B, ki_fp_filters="CP* SM*"
C37 C51: library part c_2220, "SMT capacitor, 2220", Footprint=w_smd_cap:c_2220, ki_fp_filters="SM* C? C1-1"
D1 D2 D3: library part LED-0603, "LED 0603 smd package", Footprint=LEDs:LED-0603, ki_fp_filters="LED-3MM LED-5MM LED-10MM LED-0603 LED-0805 LED-1206 LEDV"
D4: library part SMA_Handsoldering, "Diode SMA Handsoldering", Footprint=Diodes_SMD:SMA_Handsoldering, ki_fp_filters="D? S*"
D5: library part do214ac, "DO214AC", Footprint=w_smd_diode:do214ac, ki_fp_filters="D? S*"
G***: library part oshw_silkscreen-back_3mm
J1 J2 J3 J4 J5: library part 7466103, "7466103-3", Manufacturer_Name="Wurth Elektronik", Datasheet=https://componentsearchengine.com/Datasheets/2/7466103.pdf, Description="Wurth Elektronik, REDCUBE M3 Bush", Height=7, Manufacturer_Part_Number=7466103
K1: library part pinhead-1X03, "PIN HEADER", Footprint=CRF1:pinhead-1X03
L1: library part inductor_smd_8x5mm, "Inductor SMD, d.8mm x h.5mm", Footprint=w_smd_inductors:inductor_smd_8x5mm
P1 P2: library part MICRO_JST_6, Footprint=CRF1:MICRO_JST_6
P3: library part b7b-ph-kl, "JST PH series connector, B7B-PH-KL", Footprint=CRF1:b7b-ph-kl, ki_fp_filters="Pin_Header_Straight_1X07 Pin_Header_Angled_1X07 Socket_Strip_Straight_1X07 Socket_Strip_Angled_1X07"
P4 P5 P6 P7 P9: library part 1PAD_4x5mm, Footprint=CRF1:1PAD_4x5mm
P101: library part b4b-ph-kl, "JST PH series connector, B4B-PH-KL", Footprint="JST conn:b4b-ph-kl"
Q1 Q2 Q3 Q4 Q5 Q6: library part D2PAK-7-GDS, Footprint=CRF1:D2PAK-7-GDS
R1 R2 R3 R4 R5 R6 R7 R8 R9 R10 R11 R12 R13 R17 R18 R19 R20 R21 R22 R23 R24 R25 R26 R27 R28 R29 R30 R32 R33 R34 R35 R36 R37 R38 R42 R43 R46 R48 R49 R50 R51 R103 R104 R401 R402: library part SMD-0603_r, Footprint=CRF1:SMD-0603_r, ki_fp_filters="R? SM0603 SM0805 R?-* SM1206"
R53 R54: library part WSLP2726, Footprint=CRF1:WSLP2726, ki_fp_filters="R? SM0603 SM0805 R?-* SM1206"
U1: library part lqfp64_pad_mod, "LQFP-64", Footprint=CRF1:lqfp64_pad_mod
U2: library part SOT-223, "module CMS SOT223 4 pins", Footprint=CRF1:SOT-223, ki_fp_filters=SOT223
U3: library part TSSOP-56-PP, "TSSOP-56-PP", Footprint=CRF1:TSSOP-56-PP
U401: library part SOIC-8-W, "module SMD SOIC SOJ 8 pins etroit", Footprint=CRF1:SOIC-8-W, ki_fp_filters=SO8*
X1: library part USB-UX60R-MB-5ST, Footprint=CRF1:USB-UX60R-MB-5ST
X2: library part Crystal_5x3mm, Footprint=CRF1:Crystal_5x3mm, mfg#=ABM3B-8.0-10-1UT

## Via types
v1: diameter 0.8, hole 0.5, F.Cu to B.Cu, tented both sides, 115 vias
v2: diameter 1.524, hole 0.762, F.Cu to B.Cu, tented both sides, 75 vias
v3: diameter 0.889, hole 0.5, F.Cu to B.Cu, tented both sides, 9 vias

## Nets (pads, with @x,y where several pads share a name; then routed paths per layer and width w, separated by ;. In a path a pad name is that pad's centre, name@x,y a point inside that pad or via, vN(x,y) a via of type N, cw(c..) or ccw(c..) an arc to the next point about the centre after c; other vN are vias at no path point)
+5V: C33.1 D5.2 K1.2 L1.2 P1.1 P3.1 P101.4 R6.2 R17.1 U2.3 | length 115.3
  F.Cu w0.635: v1(85.979,30.065) 86.106,29.938 L1.2@86.401,29.938 ; v1(88.9,26.2) v1(88.9,27.271)
  F.Cu w1.27: R17.1@86.36,24.604 86.401,24.645 L1.2@86.401,29.938 ; L1.2@86.401,28.6 L1.2@86.401,29.938 ; v1(88.9,27.271) 86.401,29.771 L1.2@86.401,29.938
  In1.Cu w0.508: v1(79.4,17.2) 80.518,17.2
  In1.Cu w0.635: v1(88.9,26.2) v1(88.9,27.271)
  In1.Cu w1.016: K1.2@111.252,8.602 111.252,9.999 112.395,11.142 114.935,11.142 115.824,12.031 115.824,23.842 114.3,25.366 P3.1@114.3,26.969
  In1.Cu w1.27: P1.1@82.099,7.8 82.104,9.697 80.518,11.282 80.518,17.2 80.518,21.302 86.487,27.271 v1(88.9,27.271)
  In2.Cu w1.016: K1.2@111.252,8.052 K1.2@111.252,8.602 K1.2@111.252,9.618
  In2.Cu w1.27: P1.1@82.099,7.8 82.099,8.72 83.682,10.303 95.811,10.303 97.914,8.201 101.961,8.201 104.724,10.965 109.652,10.965 111.252,9.364 K1.2@111.252,8.602
  B.Cu w0.508: v1(79.4,17.2) 79.45,15.738 R6.2@79.488,15.7
  B.Cu w0.635: P101.4@80.45,31.274 80.926,31.274 83,29.2 C33.1@83,28.224 83.698,28.922 U2.3@85.598,28.922 ; C33.1@82.922,28.922 U2.3@85.598,28.922 ; U2.3@84.709,28.922 U2.3@85.598,28.922 ; v1(85.979,30.065) 85.598,29.684 U2.3@85.598,28.922 ; D5.2@108.633,11.904 108.633,11.729 111.252,9.11 K1.2@111.252,8.602
ADC_TEMP: C41.1 R1.2 R2.1 U1.17 | length 44
  F.Cu w0.203: 110.744,19.016 110.744,20.413 112.078,21.747 114.871,21.747 115.951,22.826 115.951,41.241 ; R1.2@115.824,41.876 115.951,41.749 115.951,41.241 ; R1.2@115.824,42.13 115.951,42.003 115.951,41.241
  F.Cu w0.254: U1.17@106.589,10.187 108.026,10.187 108.6,10.761 111.125,10.761 113.157,12.793 113.157,14.063 112.014,15.206 R2.1@111.76,15.206 111.379,15.206 110.744,15.841 110.744,19.016 110.998,19.27 C41.1@111.76,19.27
AN_IN: C2.2 R3.2 R4.2 U1.10 | length 28.9
  F.Cu w0.254: U1.10@101.587,8.186 101.587,6.927 v1(101.6,6.915)
  In1.Cu w0.254: v1(82.6,16.7) 83.188,16.7 89.617,10.271 98.906,10.271 101.6,7.577 v1(101.6,6.915)
  B.Cu w0.254: v1(82.6,16.7) 82.6,16.68 82.804,16.476 C2.2@83.693,16.476 84.582,16.476 84.868,16.762 R4.2@85.2,16.762 R3.2@85.2,18.138
BR_SO1: U1.27 U3.25 | length 13.2
  F.Cu w0.254: U1.27@106.589,15.186 107.803,15.186 109.872,17.255 109.872,19.548 107.158,22.262 107.158,24.171 U3.25@107.158,25.176
BR_SO2: U1.26 U3.26 | length 13.9
  F.Cu w0.254: U1.26@106.589,14.686 107.493,14.686 107.913,14.686 110.304,17.077 110.304,19.965 107.658,22.61 U3.26@107.658,25.176
CAN_RX: U1.61 U401.4 | length 12.8
  F.Cu w0.254: U401.4@91.467,15.855 91.067,15.855 89.097,13.885 89.097,13.09 88.749,12.742 88.749,11.985 89.115,11.618 89.792,11.618 90.22,12.046 90.22,12.229 90.641,12.65 92.306,12.65 92.901,12.056 92.901,11.962 93.267,11.596 93.944,11.596 94.034,11.686 U1.61@95.087,11.686
CAN_TX: U1.62 U401.1 | length 4
  F.Cu w0.254: U401.1@91.467,12.045 91.867,12.045 92.749,11.164 94.161,11.164 94.183,11.186 U1.62@95.087,11.186
CANH: P101.3 R401.1 U401.7 | length 21.2
  F.Cu w0.254: P101.3@80.587,29.275 P101.3@80.45,29.275 80.45,28.95 86.762,22.638 R401.1@86.762,22.5 88.1,21.162 v1(88.1,21.1) ; U401.7@86.533,13.315 U401.7@86.133,13.315 87.009,13.315 88.293,14.599 v1(88.293,15.348)
  In1.Cu w0.254: v1(88.1,21.1) 88.293,20.908 v1(88.293,15.348)
CANL: P101.2 R401.2 U401.6 | length 19
  F.Cu w0.203: U401.6@86.133,14.585 U401.6@86.28,14.585
  F.Cu w0.254: P101.2@80.45,27.274 81.065,27.274 85.238,23.1 R401.2@85.238,22.5 85.238,21.535 85.725,21.048 86.995,21.048 87.757,20.286 88.138,20.286 88.392,20.032 88.392,16.603 87.376,15.587 87.376,14.825 87.136,14.585 U401.6@86.133,14.585
DC_CAL: U1.33 U3.12 | length 17.1
  F.Cu w0.254: v1(100.505,26.625) 100.658,26.472 U3.12@100.658,25.176 ; U1.33@104.587,19.687 105.127,19.687 v1(105.182,19.742)
  In1.Cu w0.254: v1(100.505,26.625) 100.505,27.191 100.782,27.468 105.086,27.468 107.569,24.985 107.569,22.129 v1(105.182,19.742)
EN_GATE: U1.51 U3.16 | length 19.6
  F.Cu w0.254: U1.51@95.087,16.687 96.563,16.687 97.282,15.968 98.806,15.968 99.803,16.965 v1(100.203,17.365) ; v1(102.489,26.636) 102.657,26.469 U3.16@102.657,25.176
  In1.Cu w0.254: v1(100.203,17.365) 100.735,17.365 102.108,18.738 102.108,20.54 104.394,22.826 104.394,24.731 v1(102.489,26.636)
FAULT: U1.53 U3.6 | length 16.7
  F.Cu w0.254: U1.53@95.087,15.686 96.421,15.686 v1(96.52,15.587) ; v1(96.45,26.95) 97.222,26.95 97.658,26.514 U3.6@97.658,25.176
  In2.Cu w0.254: v1(96.45,26.95) 96.012,26.512 96.012,20.012 95.1,19.1 95.1,17.007 v1(96.52,15.587)